# Altium PCB PCB1.PcbDoc
Units mm, origin at the board's own origin, x right, y up, seen from the top; angles counter-clockwise.
Board outline 53 x 65 mm, 2 copper layers (Top Layer, Bottom Layer); 24 components, 24 nets, 100 pads, 91 vias.
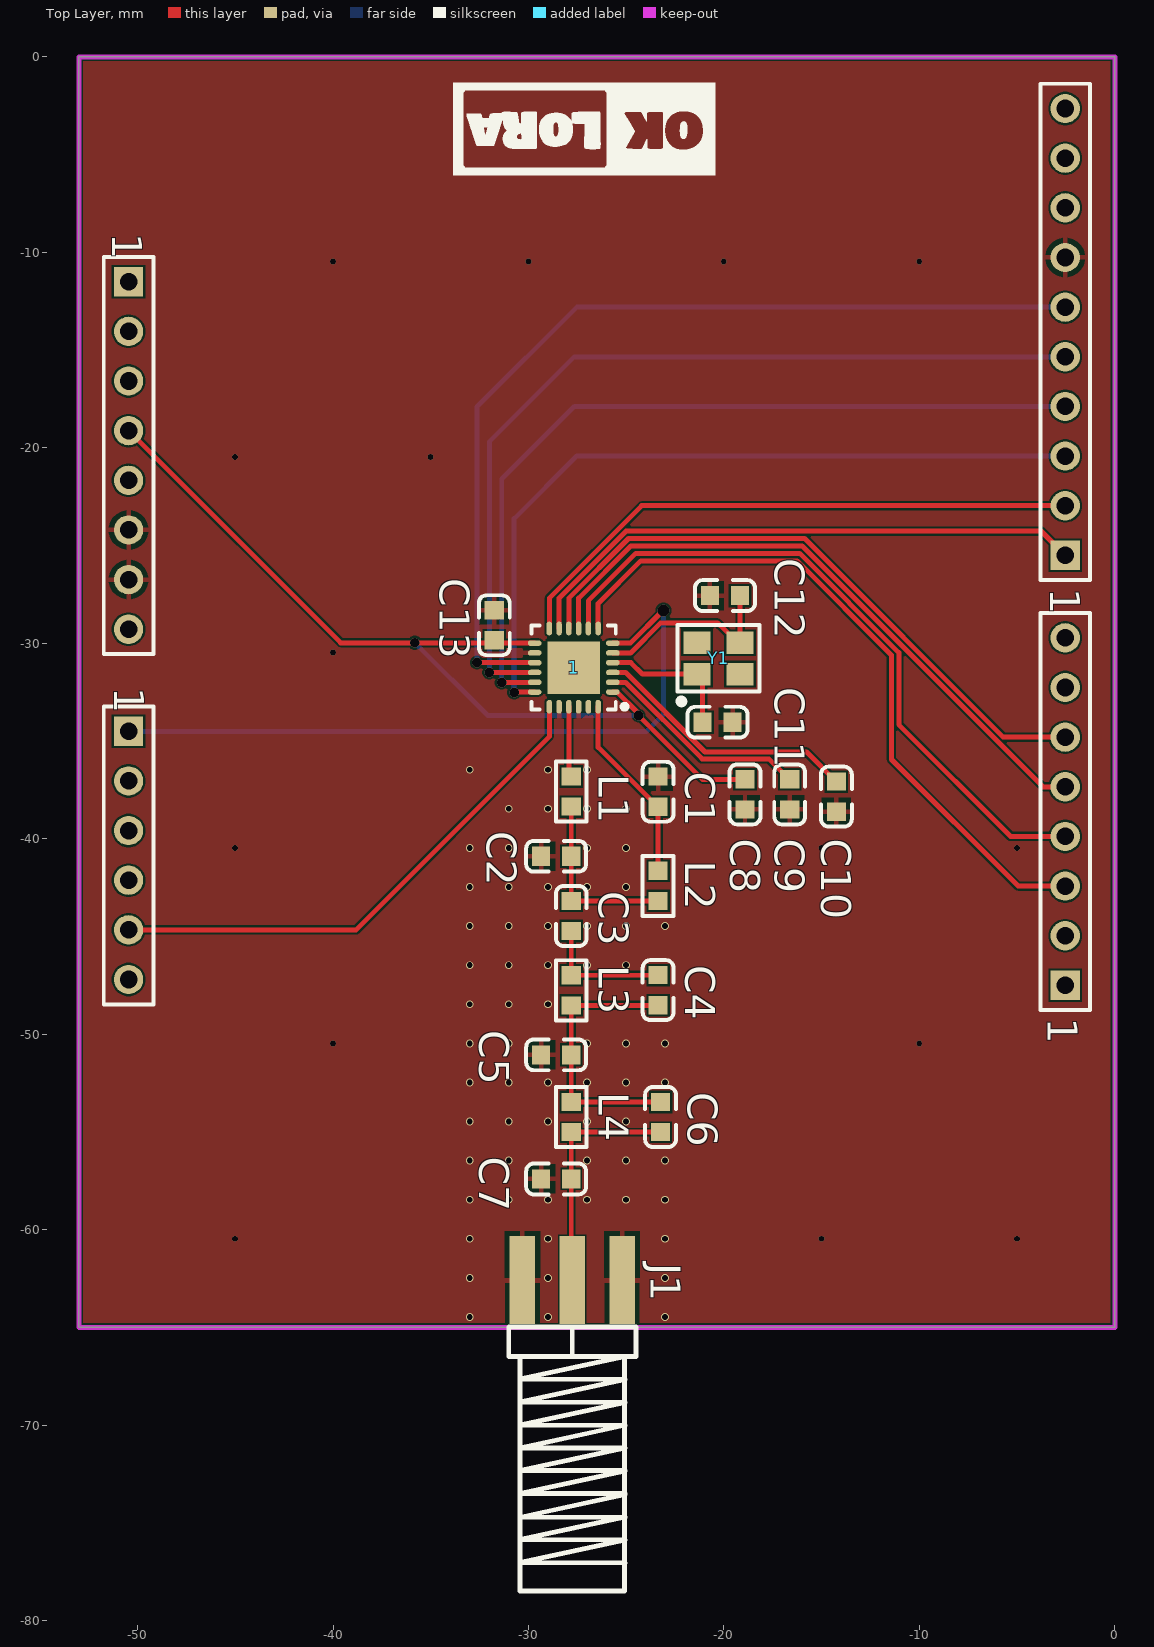
[diagram p0: Top Layer view]
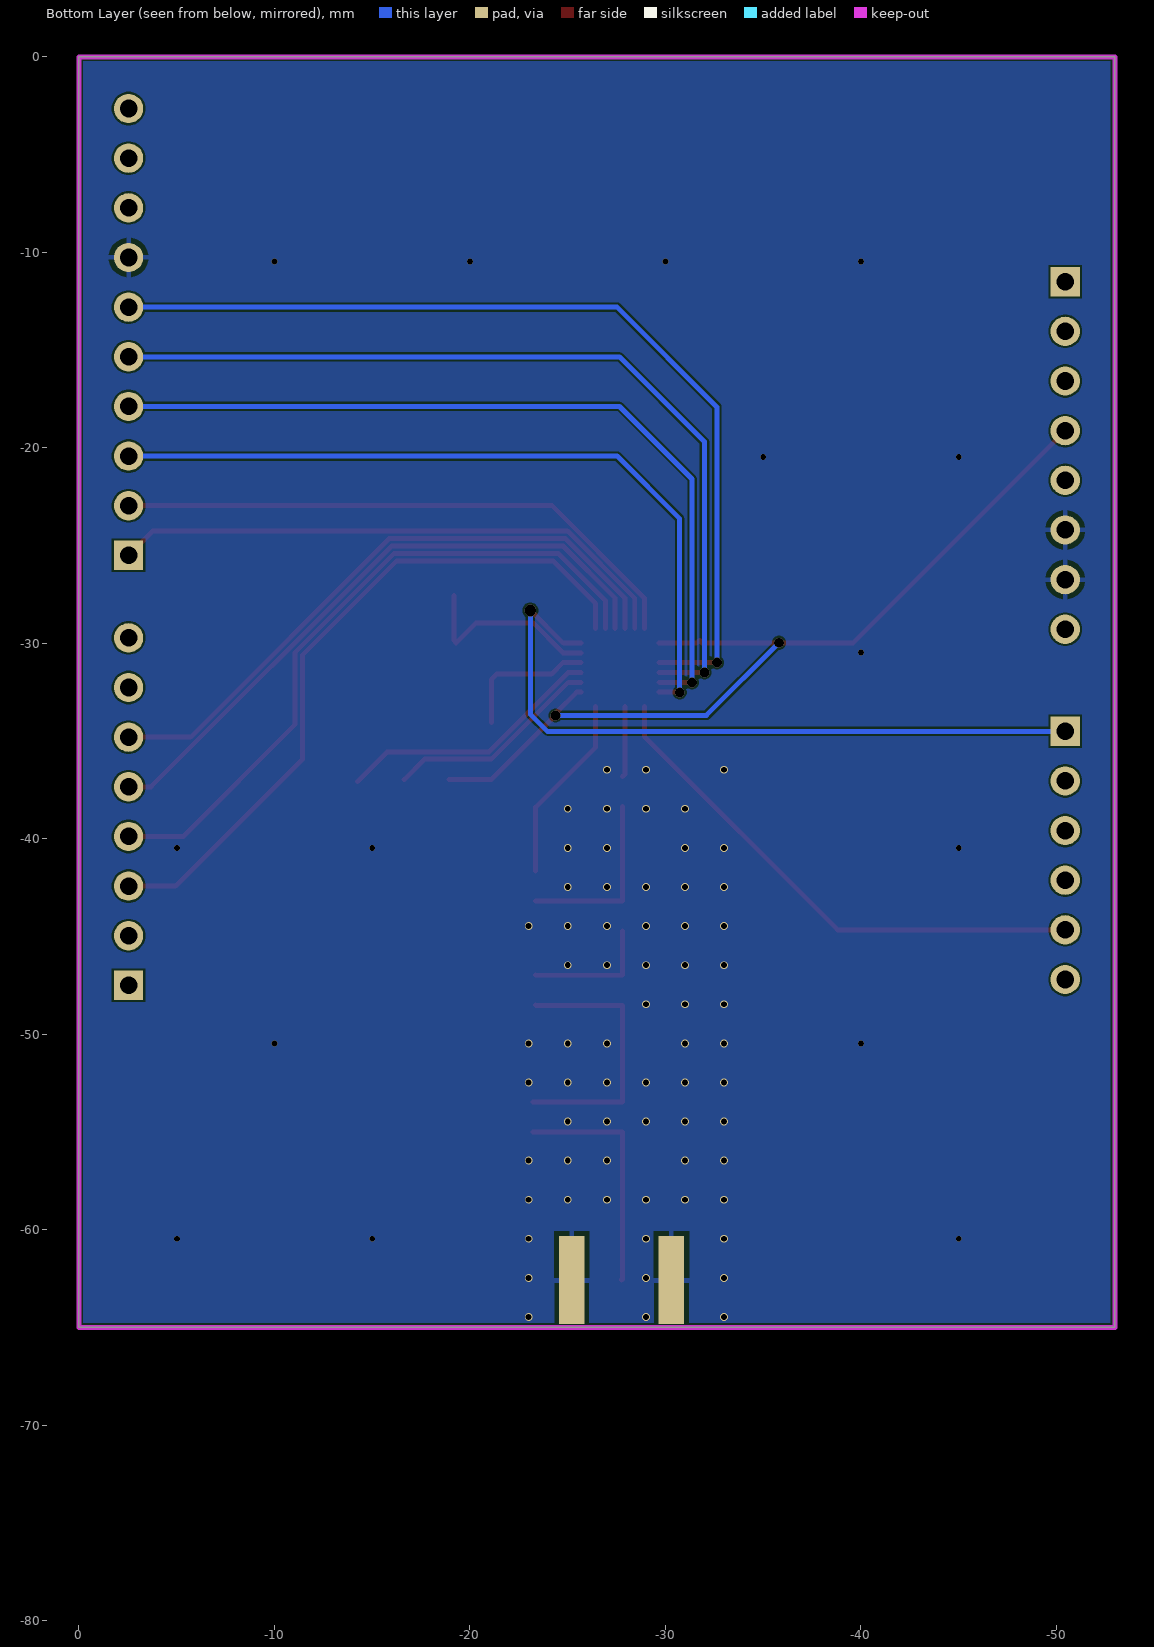
[diagram p1: Bottom Layer view, seen from below]
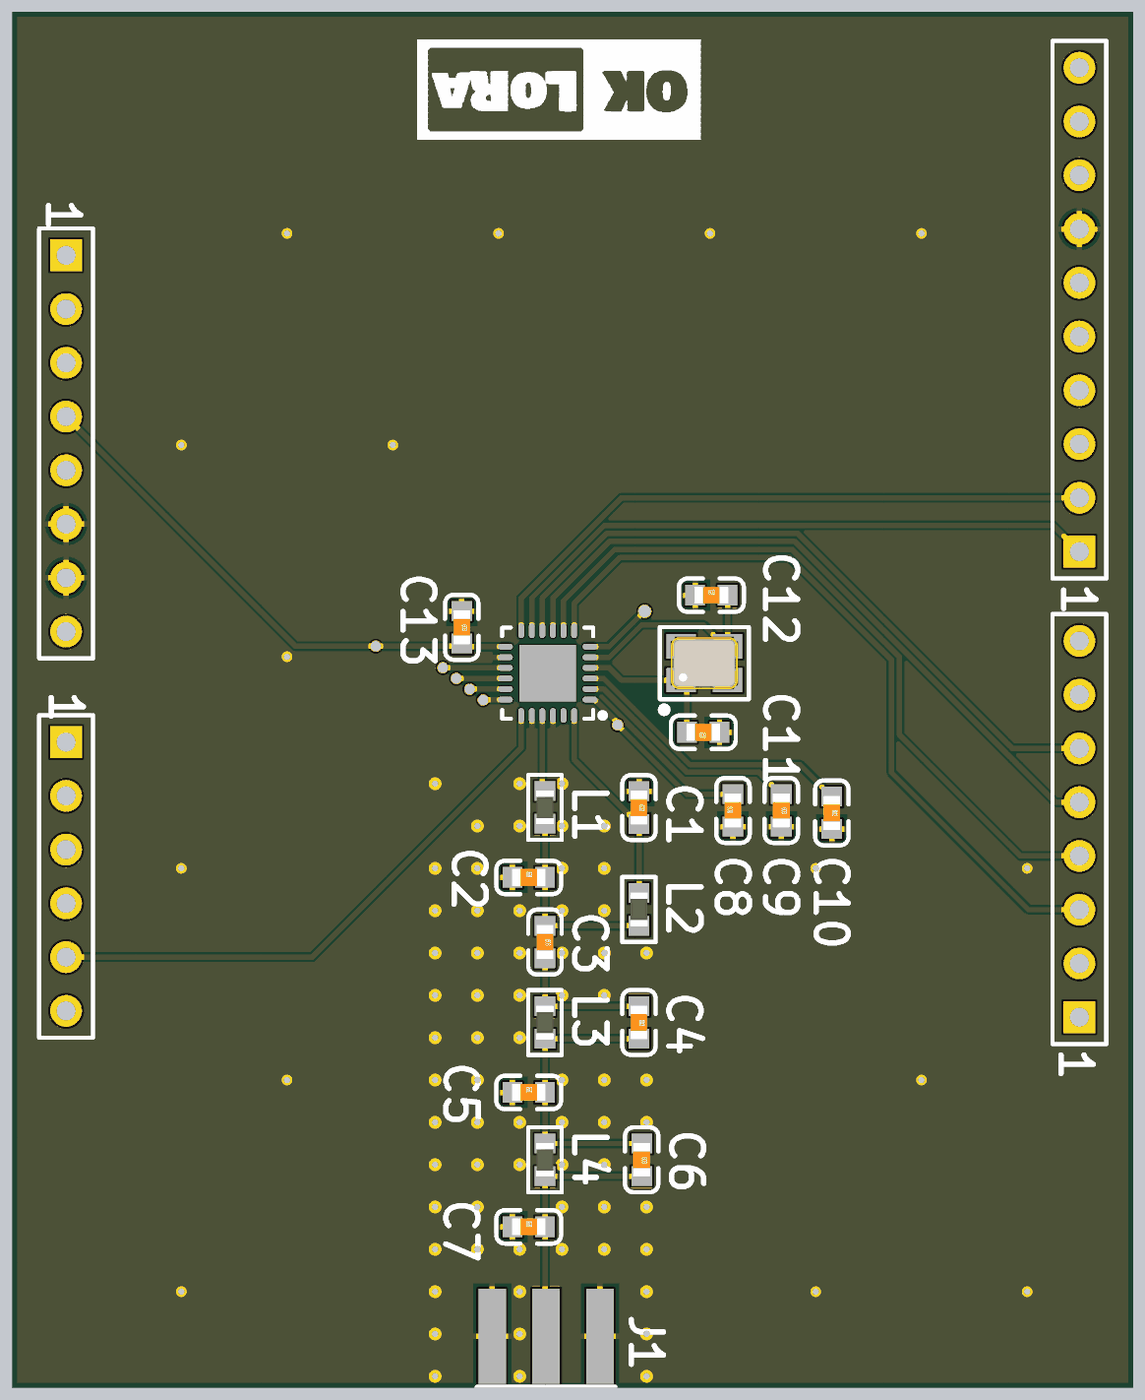
[diagram p2: 3D render of the assembled board from above, using the file's embedded part models]

## Layer stack, top to bottom
Top Solder: solder mask 0.0102, Solder Resist, Dk 3.5
Top Layer: signal copper 0.0356
Dielectric 1: dielectric 0.32, FR-4, Dk 4.8
Bottom Layer: signal copper 0.0356
Bottom Solder: solder mask 0.0102, Solder Resist, Dk 3.5

## Board outline
-53,-65 -53,0 0,0 0,-65

## Design rules (kind name [scope] priority, off if disabled: settings)
Clearance [All] p1: gap=0.1 ignorepadtopadclearanceinfootprint=FALSE
PolygonConnect [All] p1: connectstyle=Relief reliefconductorwidth=0.254 reliefentries=4 polygonreliefangle="90 Angle" airgapwidth=0.254
RoutingVias [All] p1: holewidth=0.711 width=1.27 viastyle="Through Hole" minholewidth=0.711 minwidth=1.27 maxholewidth=0.711 maxwidth=1.27
SolderMaskExpansion [All] p1: expansion=0.102 istentingtop=FALSE
Width [All] p1: maxlimit=10 minlimit=0.1 preferedwidth=0.254
30 further rules are at their usual default settings.

## Classes and differential pairs
component class Sheet1: 1 C1 C2 C3 C4 C5 C6 C7 C8 C9 C10 C11 C12 C13 J1 L1 L2 L3 L4 Y1

## Components (designator, comment, footprint, x,y, rotation, side; value= is the part's Value field where it differs from the comment)
1 "Header 8" HDR1X8 -2.54,-47.5 r90 top (schematic designator P4)
1 "Header 10" HDR1X10 -2.54,-25.5 r90 top (schematic designator P3)
1 "Header 6" HDR1X6 -50.46,-34.5 r270 top (schematic designator P2)
1 "Header 8" HDR1X8 -50.46,-11.5 r270 top (schematic designator P1)
1 "SX1208" QFN-24_4x4x05P -27.686,-31.242 r90 top
C1 "10nF (103) 10% 50V" 0603_C -23.368,-37.592 r270 top
C2 "15pF (150) 5% 50V" 0603_C -28.583,-40.894 r0 top
C3 "22pF (220) 5% 50V" 0603_C -27.813,-43.95 r270 top
C4 "2.7pF (2R7) 0.25pF 50V" 0603_C -23.368,-47.744 r270 top
C5 "15pF (150) 5% 50V" 0603_C -28.583,-51.054 r0 top
C6 "2.7pF (2R7) 0.25pF 50V" 0603_C -23.241,-54.237 r270 top
C7 "8.2pF (8R2) 0.25pF 50V" 0603_C -28.583,-57.404 r0 top
C8 "100nF (104) 10% 50V" 0603_C -18.923,-37.727 r90 top
C9 "100nF (104) 10% 50V" 0603_C -16.637,-37.727 r270 top
C10 "100nF (104) 10% 50V" 0603_C -14.249,-37.846 r270 top
C11 "15pF (150) 5% 50V" 0603_C -20.328,-34.036 r180 top
C12 "15pF (150) 5% 50V" 0603_C -19.947,-27.559 r0 top
C13 "100nF (104) 10% 50V" 0603_C -31.75,-29.075 r270 top
J1 "RF_IO" PCBComponent_1 -27.813,-64.897 r180 top
L1 "10nH ±5%" 0603_L -27.813,-37.584 r270 top
L2 "33nH ±5%" 0603_L -23.368,-42.41 r90 top
L3 "12nH ±5%" 0603_L -27.813,-47.752 r270 top
L4 "10nH ±5%" 0603_L -27.813,-54.237 r270 top
Y1 "32MHZ 12PF 10PPM" SMD-3225_4P -20.277,-30.772 r0 top

## Footprints (in the part's own frame and the unit in brackets; to place one, negate y for a bottom-side part, rotate by r counter-clockwise, add the part's x,y. Pads: shape width x height; smd on the part's side, far side on the other; paste and mask are expansions set on the pad)
0603_C [mm]
  rect 0.93x0.98 smd: 1(-0.77,0) 2(0.77,0)
  silkscreen extent -1.53,-0.79 1.54,0.79, body extent -0.8,-0.4 0.8,0.4, height 0.3
0603_L [mm]
  rect 0.93x0.98 smd: 1(-0.77,0) 2(0.77,0)
  silkscreen extent -1.54,-0.79 1.53,0.79, body extent -0.82,-0.41 0.83,0.41, height 0.46
HDR1X6 [mm] "Connector; Header; 6 Position"
  rect 1.5x1.5 hole 0.9: 1(0,0)
  round 1.5 hole 0.9: 2(2.54,0) 3(5.08,0) 4(7.62,0) 5(10.16,0) 6(12.7,0)
  silkscreen extent -1.27,-1.27 13.97,1.27
HDR1X8 [mm] "Connector; Header; 8 Position"
  rect 1.5x1.5 hole 0.9: 1(0,0)
  round 1.5 hole 0.9: 2(2.54,0) 3(5.08,0) 4(7.62,0) 5(10.16,0) 6(12.7,0) 7(15.24,0) 8(17.78,0)
  silkscreen extent -1.27,-1.27 19.05,1.27
HDR1X10 [mm] "Connector; Header; 10 Position"
  rect 1.5x1.5 hole 0.9: 1(0,0)
  round 1.5 hole 0.9: 2(2.54,0) 3(5.08,0) 4(7.62,0) 5(10.16,0) 6(12.7,0) 7(15.24,0) 8(17.78,0) 9(20.32,0) 10(22.86,0)
  silkscreen extent -1.27,-1.27 24.13,1.27
PCBComponent_1 [mm]
  rect 1.3x4.5 smd: 1(-0.052,-2.322) 2(-2.602,-2.322) 2(2.498,-2.322)
  rect 1.3x4.5 smd far side: 2(-2.602,-2.322) 2(2.498,-2.322)
  silkscreen extent -3.3,0.09 3.2,13.59
QFN-24_4x4x05P [mm]
  rect 2.68x2.68 smd mask+0.051: 0(0,0)
  oval 0.28x0.7 smd mask+0.051: 1(-1.25,-2) 2(-0.75,-2) 3(-0.25,-2) 4(0.25,-2) 5(0.75,-2) 6(1.25,-2) 13(1.25,2) 14(0.75,2) 15(0.25,2) 16(-0.25,2) 17(-0.75,2) 18(-1.25,2)
  oval 0.7x0.28 smd mask+0.051: 7(2,-1.25) 8(2,-0.75) 9(2,-0.25) 10(2,0.25) 11(2,0.75) 12(2,1.25) 19(-2,1.25) 20(-2,0.75) 21(-2,0.25) 22(-2,-0.25) 23(-2,-0.75) 24(-2,-1.25)
  silkscreen extent -2.15,-2.73 2.15,2.15
SMD-3225_4P [mm]
  rect 1.4x1.15 smd: 1(-1.1,-0.8) 2(1.1,-0.8) 3(1.1,0.8) 4(-1.1,0.8)
  silkscreen extent -2.1,-2.35 2.1,1.7, body extent -1.6,-1.25 1.6,1.25, height 0.61

## Part data
1 1: "Header, 8-Pin", LatestRevisionDate=17-Jul-2002, LatestRevisionNote="Re-released for DXP Platform.", Publisher="Altium Limited"
1: "Header, 10-Pin", LatestRevisionDate=17-Jul-2002, LatestRevisionNote="Re-released for DXP Platform.", Publisher="Altium Limited"
1: "Header, 6-Pin", LatestRevisionDate=17-Jul-2002, LatestRevisionNote="Re-released for DXP Platform.", Publisher="Altium Limited"
1: library part Component_1
C1: library part "0603 10nF (103) 10% 50V", "贴片电容", Package=0603, SuppliersPartNumber=C57112, ComponentLink1Description=供应商链接, ComponentLink1URL=http://www.szlcsc.com/product/details_58143.html, Supplier=LC
C2 C5 C11 C12: library part "0603 15pF (150) 5% 50V", "贴片电容", Package=0603, SuppliersPartNumber=C1644, ComponentLink1Description=供应商链接, ComponentLink1URL=http://www.szlcsc.com/product/details_1996.html, Supplier=LC
C3: library part "0603 22pF (220) 5% 50V", "贴片电容", Package=0603, SuppliersPartNumber=C1653, ComponentLink1Description=供应商链接, ComponentLink1URL=http://www.szlcsc.com/product/details_2005.html, Supplier=LC
C4 C6: library part "0603 2.7pF (2R7) 0.25pF 50V", "贴片电容", Package=0603, SuppliersPartNumber=C16149, ComponentLink1Description=供应商链接, ComponentLink1URL=http://www.szlcsc.com/product/details_16831.html, Supplier=LC
C7: library part "0603 8.2pF (8R2) 0.25pF 50V", "贴片电容", Package=0603, SuppliersPartNumber=C1685, ComponentLink1Description=供应商链接, ComponentLink1URL=http://www.szlcsc.com/product/details_2037.html, Supplier=LC
C8 C9 C10 C13: library part "0603 100nF (104) 10% 50V", "贴片电容", Package=0603, SuppliersPartNumber=C14663, ComponentLink1Description=供应商链接, ComponentLink1URL=http://www.szlcsc.com/product/details_15331.html, Supplier=LC
J1: library part SMB, "SMB Straight Connector", LatestRevisionDate=17-Jul-2002, LatestRevisionNote="Re-released for DXP Platform.", Publisher="Altium Limited"
L1 L4: library part "0603 10nH 5%", "贴片电感", Package=0603, SuppliersPartNumber=C15666, ComponentLink1Description=供应商链接, ComponentLink1URL=http://www.szlcsc.com/product/details_16347.html, Supplier=LC
L2: library part "0603 33nH 5%", "贴片电感", Package=0603, SuppliersPartNumber=C35050, ComponentLink1Description=供应商链接, ComponentLink1URL=http://www.szlcsc.com/product/details_36021.html, Supplier=LC
L3: library part "0603 12nH 5%", "贴片电感", Package=0603, SuppliersPartNumber=C29258, ComponentLink1Description=供应商链接, ComponentLink1URL=http://www.szlcsc.com/product/details_30010.html, Supplier=LC
Y1: library part "SMD-3225_4P  25MHZ 12PF 10PPM", "贴片晶振", Package=SMD-3225_4P, SuppliersPartNumber=C9006, ComponentLink1Description=供应商链接, ComponentLink1URL=http://www.szlcsc.com/product/details_9526.html, Supplier=LC

## Via types
v1: diameter 0.4, hole 0.3, Top Layer to Bottom Layer, 66 vias
v2: diameter 0.3, hole 0.3, Top Layer to Bottom Layer, 18 vias
v3: diameter 0.5, hole 0.5, Top Layer to Bottom Layer, 6 vias
v4: diameter 0.6, hole 0.6, Top Layer to Bottom Layer, 1 vias

## Nets (pads, with @x,y where several pads share a name; then routed paths per layer and width w, separated by ;. In a path a pad name is that pad's centre, name@x,y a point inside that pad or via, vN(x,y) a via of type N, cw(c..) or ccw(c..) an arc to the next point about the centre after c; other vN are vias at no path point)
DIO0: 1.3@-2.54,-42.42 1.7@-26.436,-29.242 | length 36.1
  Top Layer w0.254: 1.7@-26.436,-29.242 -26.436,-27.96 -24.257,-25.781 -16.256,-25.781 -11.43,-30.607 -11.43,-35.941 -4.951,-42.42 1.3@-2.54,-42.42
DIO1: 1.4@-2.54,-39.88 1.8@-26.936,-29.242 | length 35
  Top Layer w0.254: 1.8@-26.936,-29.242 -26.936,-27.825 -24.511,-25.4 -16.129,-25.4 -11.049,-30.48 -11.049,-34.163 -5.332,-39.88 1.4@-2.54,-39.88
DIO2: 1.5@-2.54,-37.34 1.9@-27.436,-29.242 | length 32.7
  Top Layer w0.254: 1.9@-27.436,-29.242 -27.436,-27.69 -24.765,-25.019 -16.002,-25.019 -3.681,-37.34 1.5@-2.54,-37.34
DIO3: 1.6@-2.54,-34.8 1.10@-27.936,-29.242 | length 32.4
  Top Layer w0.254: 1.10@-27.936,-29.242 -27.936,-27.689 -24.885,-24.638 -15.875,-24.638 -5.713,-34.8 1.6@-2.54,-34.8
DIO4: 1.1@-2.54,-25.5 1.11 | length 29.4
  Top Layer w0.254: 1.11 -28.436,-27.689 -25.004,-24.257 -3.783,-24.257 1.1@-2.54,-25.5
DIO5: 1.2@-2.54,-22.96 1.12 | length 29.9
  Top Layer w0.254: 1.12 -28.936,-27.688 -24.208,-22.96 1.2@-2.54,-22.96
GND: 1.6@-50.46,-24.2 1.7@-2.54,-10.26 1.7@-50.46,-26.74 1.14 1.20 1.22 C1.1 C2.1 C5.1 C7.1 C8.1 C9.2 C10.2 C11.1 C12.1 C13.1 J1.2
  other v1: -33.009,-64.466 -29.009,-64.466 -23.009,-64.466 -33.009,-62.466 -29.009,-62.466 -23.009,-62.466 -33.009,-60.466 -29.009,-60.466 -23.009,-60.466 -33.009,-58.466 -31.009,-58.466 -29.009,-58.466 -27.009,-58.466 -25.009,-58.466 -23.009,-58.466 -33.009,-56.466 -31.009,-56.466 -27.009,-56.466 -25.009,-56.466 -23.009,-56.466 -33.009,-54.466 -31.009,-54.466 -29.009,-54.466 -27.009,-54.466 -25.009,-54.466 -33.009,-52.466 -31.009,-52.466 -29.009,-52.466 -27.009,-52.466 -25.009,-52.466 -23.009,-52.466 -33.009,-50.466 -31.009,-50.466 -27.009,-50.466 -25.009,-50.466 -23.009,-50.466 -33.009,-48.466 -31.009,-48.466 -29.009,-48.466 -33.009,-46.466 -31.009,-46.466 -29.009,-46.466 -27.009,-46.466 -25.009,-46.466 -33.009,-44.466 -31.009,-44.466 -29.009,-44.466 -27.009,-44.466 -25.009,-44.466 -23.009,-44.466 -33.009,-42.466 -31.009,-42.466 -29.009,-42.466 -27.009,-42.466 -25.009,-42.466 -33.009,-40.466 -31.009,-40.466 -27.009,-40.466 -25.009,-40.466 -31.009,-38.466 -29.009,-38.466 -27.009,-38.466 -25.009,-38.466 -33.009,-36.466 -29.009,-36.466 -27.009,-36.466
  other v2: -45.009,-60.466 -15.009,-60.466 -5.009,-60.466 -40.009,-50.466 -10.009,-50.466 -45.009,-40.466 -15.009,-40.466 -5.009,-40.466 -40.009,-30.466 -45.009,-20.466 -45.009,-20.466 -35.009,-20.466 -40.009,-10.466 -40.009,-10.466 -30.009,-10.466 -20.009,-10.466 -10.009,-10.466 -10.009,-10.466
MISO: 1.5@-2.54,-15.34 1.16 | length 45.4
  Top Layer w0.254: v3(-32.004,-31.496) -32.002,-31.494 -29.688,-31.494 1.16
  Bottom Layer w0.254: v3(-32.004,-31.496) -32.004,-19.685 -27.659,-15.34 1.5@-2.54,-15.34
MOSI: 1.4@-2.54,-17.88 1.17 | length 42.5
  Top Layer w0.254: v3(-31.369,-32.004) -31.362,-31.997 -29.691,-31.997 1.17
  Bottom Layer w0.254: v3(-31.369,-32.004) -31.369,-21.59 -27.659,-17.88 1.4@-2.54,-17.88
Net1_2: 1.2@-25.686,-31.992 C9.1 | length 11.1
  Top Layer w0.254: 1.2@-25.686,-31.992 -25.681,-31.997 -25.033,-31.997 -21.116,-35.914 -17.705,-35.914 -16.662,-36.957 C9.1
Net1_3: 1.3@-25.686,-31.492 C10.1 | length 13.7
  Top Layer w0.254: 1.3@-25.686,-31.492 -25.681,-31.497 -25.033,-31.497 -20.97,-35.56 -15.765,-35.56 C10.1
Net1_4: 1.4@-25.686,-30.992 C11.2 Y1.1 | length 7.2
  Top Layer w0.254: 1.4@-25.686,-30.992 -24.761,-30.992 -24.181,-31.572 Y1.1 -21.098,-31.851 C11.2 C11.2@-21.098,-34.061
Net1_5: 1.5@-25.686,-30.492 C12.2 Y1.3 | length 9.9
  Top Layer w0.254: 1.5@-25.686,-30.492 -24.777,-30.492 -23.241,-28.956 -20.32,-28.956 -20.193,-29.083 -20.191,-29.083 -19.302,-29.972 -19.177,-29.847 C12.2
Net1_21: 1.21 L1.1 | length 3.6
  Top Layer w0.254: 1.21 -27.936,-36.691 L1.1
Net1_24: 1.24 C1.2 L2.2 | length 9.7
  Top Layer w0.254: 1.24 -26.436,-35.319 -23.393,-38.362 C1.2 L2.2
NetC2_2: C2.2 C3.1 L1.2 L2.1 | length 9.3
  Top Layer w0.254: L1.2 C2.2 C3.1 L2.1
NetC3_2: C3.2 C4.1 L3.1 | length 6.7
  Top Layer w0.254: C3.2 L3.1 -23.376,-46.982 C4.1
NetC4_2: C4.2 C5.2 C6.1 L3.2 L4.1 | length 14
  Top Layer w0.254: C4.2 -23.376,-48.522 L3.2 C5.2 L4.1 C6.1
NetC6_2: C6.2 C7.2 J1.1 L4.2 | length 12.2
  Top Layer w0.254: J1.1 -27.813,-62.523 C7.2 L4.2 C6.2
NSS: 1.3@-2.54,-20.42 1.18 | length 39.5
  Top Layer w0.254: v3(-30.734,-32.512) -30.719,-32.497 -29.691,-32.497 1.18
  Bottom Layer w0.254: v3(-30.734,-32.512) -30.734,-23.622 -27.532,-20.42 1.3@-2.54,-20.42
RESET: 1.1@-50.46,-34.5 1.6@-25.686,-29.992 | length 36.3
  Top Layer w0.254: 1.6@-25.686,-29.992 -24.787,-29.992 -23.116,-28.321 v4(-23.095,-28.321)
  Bottom Layer w0.254: 1.1@-50.46,-34.5 -23.959,-34.5 -23.095,-33.636 v4(-23.095,-28.321)
RXTX: 1.5@-50.46,-44.66 1.19 | length 27.2
  Top Layer w0.254: 1.5@-50.46,-44.66 -38.818,-44.66 -28.936,-34.778 1.19
SCK: 1.6@-2.54,-12.8 1.15 | length 48.3
  Top Layer w0.254: v3(-32.639,-30.988) -32.637,-30.99 -29.688,-30.99 1.15
  Bottom Layer w0.254: v3(-32.639,-30.988) -32.639,-17.907 -27.532,-12.8 1.6@-2.54,-12.8
VBAT: 1.1@-25.686,-32.492 1.4@-50.46,-19.12 1.13 C8.2 C13.2 | length 47
  Top Layer w0.254: 1.4@-50.46,-19.12 -39.608,-29.972 v3(-35.814,-29.972) -31.877,-29.972 C13.2 -31.603,-29.992 1.13 ; 1.1@-25.686,-32.492 -25.678,-32.501 -25.468,-32.501 -24.478,-33.49 -24.478,-33.589 -24.431,-33.636 -21.11,-36.957 C8.2
  Bottom Layer w0.254: v3(-35.814,-29.972) -32.097,-33.689 v3(-24.378,-33.689)
pads on no net: 1.0 1.1@-2.54,-47.5 1.1@-50.46,-11.5 1.2@-2.54,-44.96 1.2@-50.46,-14.04 1.2@-50.46,-37.04 1.3@-50.46,-16.58 1.3@-50.46,-39.58 1.4@-50.46,-42.12 1.5@-50.46,-21.66 1.6@-50.46,-47.2 1.7@-2.54,-32.26 1.8@-2.54,-7.72 1.8@-2.54,-29.72 1.8@-50.46,-29.28 1.9@-2.54,-5.18 1.10@-2.54,-2.64 1.23 Y1.2 Y1.4

## Polygon pours and split planes (outlines as drawn)
GND on Bottom Layer "GND_L02_P001" (solid, pour order 1): -52.959,0 -52.959,-65.024 0,-65.024 0,0
GND on Top Layer "GND_L01_P000" (solid, remove dead copper, pour order 0): 0,0 0,-65.024 -52.959,-65.024 -52.959,0

## Keep-outs
Keep-Out Layer:
  the board outline again, w0.254

## Silkscreen, mask and mechanical layers (free items; w line width, h text height)
Top Overlay:
  drawing of 936 lines, arcs and shapes, not listed